# Altium PCB ECE315_S20.PcbDoc (part 2 of 2)
Units mil, origin at the board's own origin, x right, y up, seen from the top; angles counter-clockwise.
Board outline 3957.04 x 3960.03 mil, 2 copper layers (Top Layer, Bottom Layer); 148 components, 79 nets, 466 pads, 123 vias.
Unrouted connection lines stored in the file: 250.
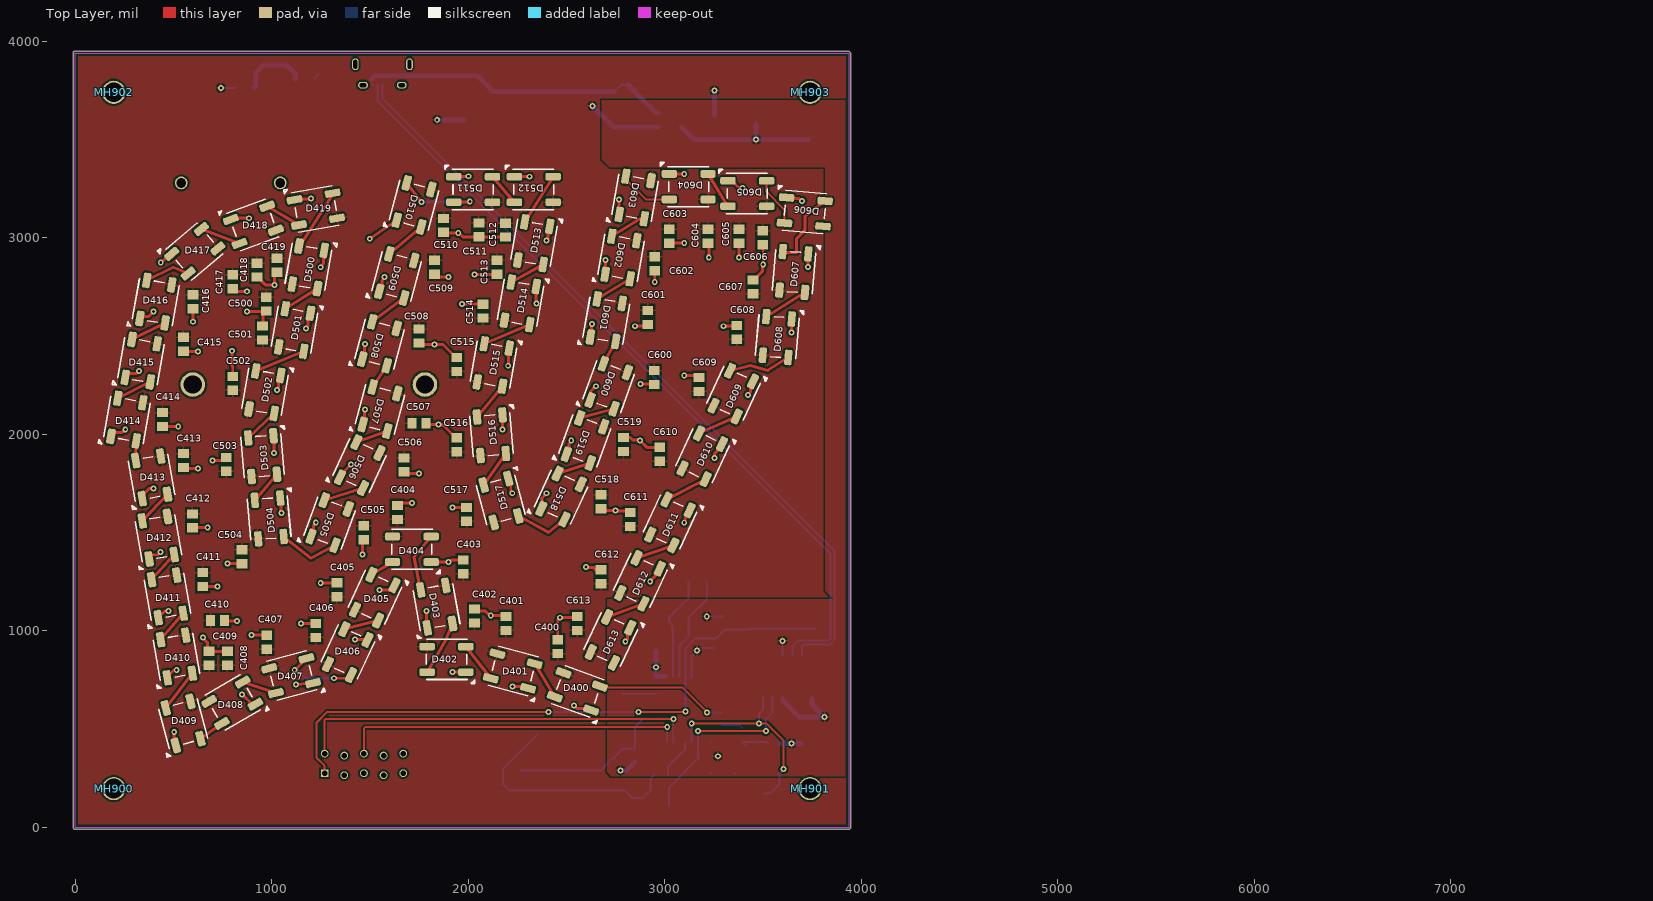
[diagram p0: Top Layer view]

## Via types
v1: diameter 30, hole 15, Top Layer to Bottom Layer, 123 vias

## Nets (pads, with @x,y where several pads share a name; then routed paths per layer and width w, separated by ;. In a path a pad name is that pad's centre, name@x,y a point inside that pad or via, vN(x,y) a via of type N, cw(c..) or ccw(c..) an arc to the next point about the centre after c; other vN are vias at no path point) (continued)
GND: (continued)
  Top Layer w15: D414.3 182.92,1992.24 199.91,2009.22 239.72,2009.22 v1(255.5,2025) ; D415.3 255.5,2292.24 272.48,2309.22 311.66,2309.22 v1(325,2322.56) ; D416.3 339.14,2598.48 373.48,2598.48 v1(400,2625) ; D413.3 342.32,1688.52 378.8,1725 v1(400,1725) ; D412.3 376.5,1369.89 393.49,1386.87 421.9,1386.87 v1(435.03,1400) ; D411.3 423.39,1071.23 440.37,1088.22 444.82,1088.22 456.6,1100 v1(475,1100) ; v1(436.09,2875) 440.14,2875 483.32,2918.18 D417.3 ; C414.1 v1(525,2039.57) ; D410.3 469.22,765.61 503.6,800 v1(517.15,800) ; v1(504.45,485.63) 504.45,425.38 D409.3 ; C413.1 557.31,1825 v1(625,1825) ; C415.1 v1(625,2422.29) ; C412.1 598.3,1525 v1(675,1525) ; v1(600,2572.67) C416.1@600,2616.15 ; v1(650,966.21) 650,963.18 675,938.18 675,902.44 C409.1 C408.1 ; C411.1@675,1225.22 724.78,1225.22 v1(725,1225) ; v1(700,1866.41) 753.11,1866.41 C503.1 ; C410.1@775,1052.37 775,1051.56 776.56,1050 v1(825,1050) ; v1(775,1341.75) C504.1@825,1341.75 ; D418.3 799.09,3099.71 884.91,3099.71 v1(885.08,3099.53) ; v1(799.09,2425) 799.09,2348.9 802.5,2345.49 C502.1 C502.1@802.72,2294.53 ; C417.1 816.01,2727.75 v1(875,2727.75) ; v1(849.35,675) 852.05,675 900.31,626.75 D408.3 ; v1(875,2625) C500.1@950,2625 ; v1(897.88,977.59) C407.1 C407.1@978.94,977.59 ; C418.1 928.94,2800 968.29,2760.65 v1(1014.8,2760.65) 1014.8,2812.84 C419.1 ; C501.1 956.87,2553.57 956.87,2610.85 C500.1 ; D503.3 1012.45,1990.39 1012.45,1905.42 v1(1013.03,1904.84) ; v1(1027.3,2225) 1027.3,2229.06 1035.11,2236.87 1035.11,2287.9 D502.3 ; D504.3 1047.98,1671.7 1047.98,1602.02 v1(1050,1600) ; D419.3 1121.85,3198.36 1198.36,3198.36 v1(1200,3200) ; v1(1125,725.74) D407.3 ; v1(1150,1037.08) C406.1 ; v1(1175,2539.05) 1175,2543.11 1185.56,2553.66 1185.56,2603.86 D501.3 ; D505.3 1214.21,1493.24 1214.21,1536.52 1225,1547.31 v1(1225,1551.37) ; v1(1250,1243.81) C405.1 C405.1@1341.76,1253.3 ; v1(1250,2850) 1250,2854.06 1264.29,2868.35 1264.29,2932.23 D500.3 ; D506.3 1348.09,1790.52 v1(1404.44,1846.87) ; v1(1424.53,955.03) 1486.01,955.03 D406.3 ; D508.3 1472.13,2393.6 1472.13,2456.69 v1(1475,2459.56) ; v1(1463.66,1388) 1463.66,1457.83 C505.1 ; D507.3 1472.13,2058.91 1472.13,2122.29 v1(1475,2125.16) ; v1(1499.5,2995.2) D510.3 D510.3@1647.13,3099.43 ; D509.3 1561.78,2740.7 1561.78,2782.72 1575,2795.94 v1(1575,2800) ; v1(1549.03,1208.38) 1603.08,1208.38 D405.3 ; C404.1 1652.66,1650 v1(1714.57,1650) ; C506.1 1683.05,1800 v1(1750,1800) ; C508.1 1757.87,2456.69 v1(1829.76,2456.69) 1872.28,2456.69 1938.1,2390.88 C515.1 ; C507.1 C507.1@1795.2,2046.38 ; v1(1788.94,1100) 1789.16,1099.78 1789.16,1018.16 D403.3 ; C507.1@1790.31,2051.26 1791.13,2050.44 v1(1850,2050.44) 1852.87,2047.57 1872.22,2047.57 1938.1,1981.69 C516.1 ; C509.1 1844.33,2800 v1(1900,2800) ; D404.3@1850,1350 v1(1900,1350) 1904.06,1350 1914.49,1360.43 C403.1 ; C510.1 1877.71,3025 v1(1950,3025) 1954.06,3025 1975.49,3003.57 2053.39,3003.57 C511.1 2188.88,3004.94 C512.1 ; v1(1920.75,789.51) D402.3 ; v1(1920.75,1627.63) C517.1 ; D511.3 2000,3310.83 v1(2002.34,3313.16) ; v1(1968.5,2662.4) C514.1 ; C402.1 2043.02,1100 2088.21,1100 2111.32,1076.89 v1(2115.38,1076.89) 2188.08,1076.89 C401.1 C401.1@2193.94,1071.04 ; v1(2032.81,2814.15) 2147.56,2814.15 C513.1 ; v1(2175,2025) 2176.01,2026.01 2176.01,2098.33 D516.3 ; D517.3 2217.15,1762.18 2217.15,1711.91 2225,1704.06 v1(2225,1700) ; v1(2204.2,2348.9) 2205.14,2349.84 2205.14,2433.87 D515.3 ; v1@2225,718.69 v1(2226.91,716.78) 2296.24,716.78 D401.3 ; D512.3 v1(2313.21,3310.83) ; v1(2347.39,2666.29) 2345.68,2668 2345.68,2750.24 D514.3 ; D518.3 2375.43,1624.26 2375.43,1671.53 2373.48,1673.48 v1(2400,1700) ; v1(2400,2985.44) 2400,2989.5 2405.59,2995.09 2405.59,3047.91 D513.3 ; C400.1@2456.38,954.97 C400.1 2456.28,1054.63 v1(2468.15,1066.49) 2549.14,1066.49 C613.1 ; D519.3 2513.78,1911.74 2513.78,1953.23 2525,1964.44 v1(2525,1968.5) ; v1@2539.8,622.01 v1(2539.8,619.3) 2555.16,603.94 2618.71,603.94 D400.3 ; v1(2600,1325) 2602.07,1322.93 2637.5,1322.93 C612.1@2650,1310.43 ; D600.3 2623.48,2176.34 2623.48,2217.85 v1(2650,2244.37) ; D601.3 2628.84,2501.12 2628.84,2559.49 v1(2631.55,2562.19) ; C518.1 2684.61,1613.12 v1(2750.66,1613.12) 2753.53,1610.25 2817.34,1610.25 C611.1 ; D602.3 2700.24,2817.33 2700.24,2886.69 v1(2700,2886.92) ; D603.3 v1(2768.93,3195.03) ; C519.1 2825,1983.12 2837.5,1970.62 2872.88,1970.62 v1(2875,1968.5) 2909.84,1933.67 C610.1 ; v1@2800,940.46 v1(2800,944.52) 2811.49,956.01 2811.49,1001.39 D613.3 ; v1(2850,2550) 2905.13,2550 C601.1 ; v1(2877.98,2256.31) 2944.37,2256.31 C600.1 ; v1(2926.84,1250) 2926.84,1253.89 2975.47,1302.52 D612.3 ; v1(2950,2774.5) C602.1 ; C603.1 v1(3100,2972.57) ; D604.3 v1(3100,3325) ; v1(3100,1550) 3102.87,1552.87 3102.87,1569.09 3127.78,1594.01 D611.3 ; v1(3100,2300) 3163.39,2300 C609.1 ; C604.1 3225,2968.6 v1(3225,2900) ; v1(3254.64,1879.64) 3254.81,1879.81 3254.81,1901.7 3292.38,1939.27 D610.3 ; v1(3300,2550) 3363.15,2550 C608.1 ; D605.3@3330.34,3297.98 D605.3 3342.11,3290.07 3379.31,3252.87 v1(3397.13,3252.87) v1@3400,3250 ; v1(3379.31,2900) C605.1 ; v1(3425,2200) 3425,2204.06 3436.49,2215.55 3436.49,2254.8 D609.3 ; C607.1 3453.94,2785.43 3499.11,2830.6 3499.11,2860.5 v1(3501.98,2863.37) ; C606.1@3498.71,2963.28 C606.1 ; D606.3 3626.26,3199.63 3683.83,3199.63 3695.94,3187.51 v1(3700,3187.51) ; v1@3646.58,2516.87 v1(3645.73,2517.73) 3645.73,2586.39 D608.3 ; v1@3731.32,2850 3730.46,2850.86 3730.46,2917.42 D607.3
  other v1: 3730.89,2850.43
LED: R303.2 U300.15 | length 115.7
  Bottom Layer w10: U300.15 3380.52,521.26 R303.2
LED0: D400.2 D401.4 | length 197.4
  Top Layer w15: D401.4 D400.2
LED1: D401.2 D402.4 | length 205.1
  Top Layer w15: D402.4 D401.2
LED2: D402.2 D403.4 | length 279.9
  Top Layer w15: D402.2 1886.56,953.41 D403.4
LED3: D403.2 D404.4 | length 306.4
  Top Layer w15: D403.2 1725,1375 D404.4
LED4: D404.2 D405.4 | length 125.4
  Top Layer w15: D405.4 D404.2
LED5: D405.2 D406.4 | length 177.9
  Top Layer w15: D406.4 D405.2
LED6: D406.2 D407.4 | length 396
  Top Layer w15: v1(1117.74,800.73) 1119.26,800.73 D407.4 ; v1(1318.14,758.45) 1387.89,758.45 D406.2
  Bottom Layer w15: v1(1117.74,800.73) 1130.62,800.73 1172.9,758.45 v1(1318.14,758.45)
LED7: D407.2 D408.4 | length 178
  Top Layer w15: D408.4 D407.2
LED8: D408.2 D409.4 | length 133.8
  Top Layer w15: D409.4 D408.2
LED9: D409.2 D410.4 | length 222.4
  Top Layer w15: D409.2 D410.4
LED10: D410.2 D411.4 | length 177.7
  Top Layer w15: D410.2 D411.4
LED11: D411.2 D412.4 | length 171.8
  Top Layer w15: D411.2 D412.4
LED12: D412.2 D413.4 | length 186.6
  Top Layer w15: D412.2 D413.4
LED13: D413.2 D414.4 | length 100.4
  Top Layer w15: D413.2 D414.4
LED14: D414.2 D415.4 | length 186.2
  Top Layer w15: D414.2 D415.4
LED15: D415.2 D416.4 | length 187.9
  Top Layer w15: D415.2 D416.4
LED16: D416.2 D417.4 | length 233.2
  Top Layer w15: D416.2 500,2850 D417.4
LED17: D417.2 D418.4 | length 207.6
  Top Layer w15: D417.2 D418.4
LED18: D418.2 D419.4 | length 187.7
  Top Layer w15: D418.2 D419.4
LED19: D419.2 D500.4 | length 322.6
  Top Layer w15: D500.4@1153.73,2973 1313.64,3224.97 D419.2@1337.27,3230.26
LED20: D500.2 D501.4 | length 193.4
  Top Layer w15: D501.4 D500.2
LED21: D501.2 D502.4 | length 264
  Top Layer w15: D502.4 D501.2
LED22: D502.2 D503.4 | length 181.9
  Top Layer w15: D503.4 D502.2
LED23: D503.2 D504.4 | length 173.8
  Top Layer w15: D504.4 D503.2
LED24: D504.2 D505.4 | length 315.7
  Top Layer w15: D504.2 1200,1369.89 D505.4
LED25: D505.2 D506.4 | length 207.2
  Top Layer w15: D505.2 D506.4
LED26: D506.2 D507.4 | length 167.9
  Top Layer w15: D506.2 D507.4
LED27: D507.2 D508.4 | length 130
  Top Layer w15: D507.2 D508.4
LED28: D508.2 D509.4 | length 202.7
  Top Layer w15: D508.2 D509.4
LED29: D509.2 D510.4 | length 213.3
  Top Layer w15: D509.2 D510.4
LED30: D510.2 D511.4 | length 454.6
  Top Layer w15: D510.2 1762.2,3181.36 1762.27,3181.26 v1(1762.06,3181.26) ; D511.4@1927.31,3181.01 1929.28,3182.99 2006.58,3182.99 v1(2008.66,3185.08)
  Bottom Layer w15: v1(1762.06,3181.26) 1763.97,3183.17 2006.76,3183.17 v1(2008.66,3185.08)
LED31: D511.2 D512.4 | length 171.3
  Top Layer w15: D511.2 D512.4
LED32: D512.2 D513.4 | length 271.8
  Top Layer w15: D513.4 D512.2
LED33: D513.2 D514.4 | length 185.5
  Top Layer w15: D514.4 D513.2
LED34: D514.2 D515.4 | length 251.3
  Top Layer w15: D515.4 D514.2
LED35: D515.2 D516.4 | length 203.2
  Top Layer w15: D516.4 D515.2
LED36: D516.2 D517.4 | length 197.5
  Top Layer w15: D517.4 D516.2
LED37: D517.2 D518.4 | length 281.2
  Top Layer w15: D517.2 2409.75,1500 D518.4
LED38: D518.2 D519.4 | length 174.9
  Top Layer w15: D518.2 D519.4
LED39: D519.2 D600.4 | length 181.8
  Top Layer w15: D519.2 D600.4
LED40: D600.2 D601.4 | length 129.3
  Top Layer w15: D600.2 D601.4
LED41: D601.2 D602.4 | length 197
  Top Layer w15: D601.2 D602.4
LED42: D602.2 D603.4 | length 169
  Top Layer w15: D602.2 2875,3096.79
LED43: D603.2 D604.4 | length 279.4
  Top Layer w10: D603.2 2803.12,3297.24 2905.33,3195.03 D604.4
LED44: D604.2 D605.4 | length 193.5
  Top Layer w15: D604.2 D605.4
LED45: D605.2 D606.4 | length 252.4
  Top Layer w10: D605.2 3519.28,3233.24 3609.89,3142.62 D606.4
LED46: D606.2 D607.4 | length 403.4
  Top Layer w15: D607.4 3606.23,2925.26 3672.07,2925.26 3672.07,2996.87 3713.6,3038.4 3713.6,3110.01 D606.2
LED47: D607.2 D608.4 | length 232.6
  Top Layer w15: D608.4 D607.2
LED48: D608.2 D609.4 | length 322.6
  Top Layer w15: D609.4 3436.49,2350 3525,2325 D608.2
LED49: D609.2 D610.4 | length 210.8
  Top Layer w15: D610.4 D609.2
LED50: D610.2 D611.4 | length 224.5
  Top Layer w15: D611.4 D610.2
LED51: D611.2 D612.4 | length 197.5
  Top Layer w15: D612.4 D611.2
LED52: D612.2 D613.4 | length 196.4
  Top Layer w15: D613.4 D612.2
LED53: D613.2
LED_R: D300.1 R303.1 | length 158.8
  Bottom Layer w10: R303.1@3416.02,414.89 R303.1 3516.19,433.51 D300.1 D300.1@3523.08,430.56
MCU_RX: TP801.1 U300.20 U800.6 | length 1071
  Top Layer w10: v1(3138.13,528.82) 3138.53,528.42 3479.6,528.42 v1(3480,528.02) 3519.89,528.02 3605,442.92 v1(3605,295.67)
  Bottom Layer w10: U300.20 v1(3138.13,528.82) ; v1(3480,528.02) 3480,576.56 3500,596.56 U800.6 ; TP801.1 3538.38,172.6 3584.56,218.78 3584.56,273.68 3605,294.12 v1(3605,295.67)
MCU_TX: TP800.1 U300.19 U800.5 | length 973.1
  Top Layer w10: v1(3169.62,489.76) v1(3515.72,489.76)
  Bottom Layer w10: TP800.1 3023.55,202.15 3169.62,348.22 U300.19 v1(3169.62,489.76) ; v1(3515.72,489.76) 3515.72,550.3 3550,584.57 U800.5
NRST: J300.2 R300.1 U300.4 U301.3 U301.4 | length 3202
  Top Layer w10: J300.2 1270,312.43 1228.6,353.83 1228.6,532.88 1283.17,587.45 v1(2409.75,587.45) ; v1(2867.61,586.1) 2869.2,587.68 3105.05,587.68 v1(3106.63,589.27)
  Bottom Layer w10: v1(2409.75,587.45) 2410.43,586.77 2866.93,586.77 v1(2867.61,586.1) ; v1(3106.63,589.27) U300.4 3106.63,910.64 3155.99,960 3259.73,960 3306.3,1006.57 R300.1 3434.34,1006.57 U301.4 U301.3
OCS_IN: C301.2 U300.2 X300.1 | length 533.3
  Bottom Layer w10: U300.2 3043.64,998.91 3036.86,1005.69 3036.86,1034.76 X300.1 3022.17,1065.19 3120.6,1163.62 C301.2
OSC_OUT: C300.2 U300.3 X300.2 | length 541.4
  Bottom Layer w10: U300.3 3075.14,925.35 3120.6,970.81 X300.2 3120.6,1065.19 3214.57,1159.16 C300.2
SPI_CLK: U300.10
SPI_MOSI: U300.12
SWCLK: J300.5 U300.24 | length 1751.7
  Top Layer w10: J300.5 1470,503.32 1476.68,510 v1(3013.64,510)
  Bottom Layer w10: U300.24 3013.39,434.91 3013.39,503.64 3013.64,503.89 v1(3013.64,510)
SWDIO: J300.1 U300.23 | length 2067.1
  Top Layer w10: J300.1 1268.15,376.85 1268.15,544.14 1274,550 3043.46,550 v1(3044.59,551.13)
  Bottom Layer w10: U300.23 3044.12,434.14 3044.12,550.65 v1(3044.59,551.13)
VBAT: Q200.3 S200.3 S200.6
VBAT_POS: J200.3 Q200.2
VIN: L200.1 S200.2 S200.5 | length 344.5
  Bottom Layer w25: L200.1 919.48,3775.02 919.48,3840.25 959.23,3880 1075.71,3880 1121.85,3833.86 S200.5
VPWR: C200.2 C400.2 C401.2 C402.2 C403.2 C404.2 C405.2 C406.2 C407.2 C408.2 C409.2 C410.2 C411.2 C412.2 C413.2 C414.2 C415.2 C416.2 C417.2 C418.2 C419.2 C500.2 C501.2 C502.2 C503.2 C504.2 C505.2 C506.2 C507.2 C508.2 C509.2 C510.2 C511.2 C512.2 C513.2 C514.2 C515.2 C516.2 C517.2 C518.2 C519.2 C600.2 C601.2 C602.2 C603.2 C604.2 C605.2 C606.2 C607.2 C608.2 C609.2 C610.2 C611.2 C612.2 C613.2 D400.1 D401.1 D402.1 D403.1 D404.1 D405.1 D406.1 D407.1 D408.1 D409.1 D410.1 D411.1 D412.1 D413.1 D414.1 D415.1 D416.1 D417.1 D418.1 D419.1 D500.1 D501.1 D502.1 D503.1 D504.1 D505.1 D506.1 D507.1 D508.1 D509.1 D510.1 D511.1 D512.1 D513.1 D514.1 D515.1 D516.1 D517.1 D518.1 D519.1 D600.1 D601.1 D602.1 D603.1 D604.1 D605.1 D606.1 D607.1 D608.1 D609.1 D610.1 D611.1 D612.1 D613.1 L200.2 TP200.1 U200.1 | length 735.3
  Bottom Layer w10: v1(742.09,3762.41) 816.32,3762.41 L200.2 ; TP200.1@1979.51,3600.49 TP200.1 ; U200.1@2963.26,3569.41 U200.1 ; C200.2 C200.2@3254.05,3621.43 ; v1@3254.05,3748.45 v1@3254.59,3749
  Bottom Layer w25: v1(1842.96,3600.49) TP200.1@1979.51,3600.49 ; v1(2632.41,3670.87) 2740.68,3562.6 U200.1 ; C200.2@3254.05,3621.43 v1@3254.05,3748.45
  other v1: 3254.05,3749
WS2812B: D400.4 U300.13 | length 673.9
  Top Layer w10: D400.4 2677.21,711.96 3088.83,711.96 v1(3216.54,584.25)
  Bottom Layer w10: v1(3216.54,584.25) U300.13
pads on no net: J200.1 J200.2 J300.6 J300.7 J300.8 J300.9 J300.10 J800.4 MH900.1 MH901.1 MH902.1 MH903.1 U200.4 U300.6 U300.7 U300.8 U300.9 U300.11 U300.14 U300.18 U300.22 U300.25 U300.26 U300.28 U300.29 U300.30 U800.2 U800.3 U800.7 U800.8 U800.9 U800.10

## Polygon pours and split planes (outlines as drawn)
3.3V on Bottom Layer "3.3V_L02_P080" (solid, pour order 96): 3233.56,432.72 3217.16,416.33 3217.16,256.55 3398.22,260.22 3387.45,288.06 3310.24,433.51
GND on Bottom Layer "GND_L02_P-001" (solid, pour order 101): 0,3960 0,0 3940,0 3940,3940
VBAT_POS on Bottom Layer "VBAT_POS_L02_P-005" (solid, remove dead copper, pour order 97): 490,3510 490,3240 738.19,3240 738.19,3510
VIN on Bottom Layer "VIN_L02_P-004" (solid, remove dead copper, pour order 98): 1080,3900 1080,3500 850,3500 850,3400 1530,3400 1530,3500 1160,3500 1160,3900
5.0V on Bottom Layer "5.0V_L02_P-003" (solid, remove dead copper, pour order 99): 1180,3900 1180,3520 1523.04,3520 1523.04,3777.71 1300,3777.71 1300,3900
VBAT on Bottom Layer "VBAT_L02_P-002" (solid, remove dead copper, pour order 100): 700,3900 700,3520 1060,3520 1060,3900
VPWR on Top Layer "VPWR_L01_P079" (solid, pour order 95): 0,3960 0,0 3980,0 3960,20 3960,3960
3.3V on Top Layer "3.3V_L01_P078" (solid, pour order 94): 2680,3700 3920,3700 3920,260 2727.72,260 2707.72,280 2707.72,1160 3860,1160 3817.32,1202.68 3817.32,3360 2720,3360 2680,3400

## Keep-outs
Keep-Out Layer:
  lines w6: 0,0 80,0 3940,0 3940,3940 3860,3940 0,3940 0,0

## Other copper
Bottom Layer:
  region: 7856.57,-124.13

## Silkscreen, mask and mechanical layers (free items; w line width, h text height)
Bottom Overlay:
  text "5.0V" at 2660,3768.78 h40
  text "VPWR" at 2050,3500 h40
  text "3.3V" at 3807.66,3380 h40
  text "GND" at 2590,3360 h40
  text "GND" at 3590,1316.98 h40
  text "MCU_TX" at 2897.74,50 h40
  text "MCU_RX" at 3620.87,50 h40
Mechanical 2:
  lines w20: 0,3937.01 0,0 3937.01,0 3937.01,3937.01 ; 0,3940 3934.02,3940

## Text inside footprints (layer, text, board x,y; h text height)
J200: Bottom Overlay "Do Not Place Parts Here!!!" at 900.95,1971.22 h35 r270; Bottom Overlay "Battery Holder" at 1125.95,1906.22 h35 r270
J300: Mechanical 1 "Albert Liu" at 1136,84 h35 r180
J800: Mechanical 1 "Board Edge" at 1458.9,3985 h35 r180